# Altium PCB Compressor.PcbDoc (part 1 of 2)
Units mm, origin at the board's own origin, x right, y up, seen from the top; angles counter-clockwise.
Board outline 111 x 68.75 mm, 2 copper layers (Top Layer, Bottom Layer), stack 1.57 mm thick; 59 components, 13 nets, 218 pads, 0 vias.
Unrouted connection lines stored in the file: 54.
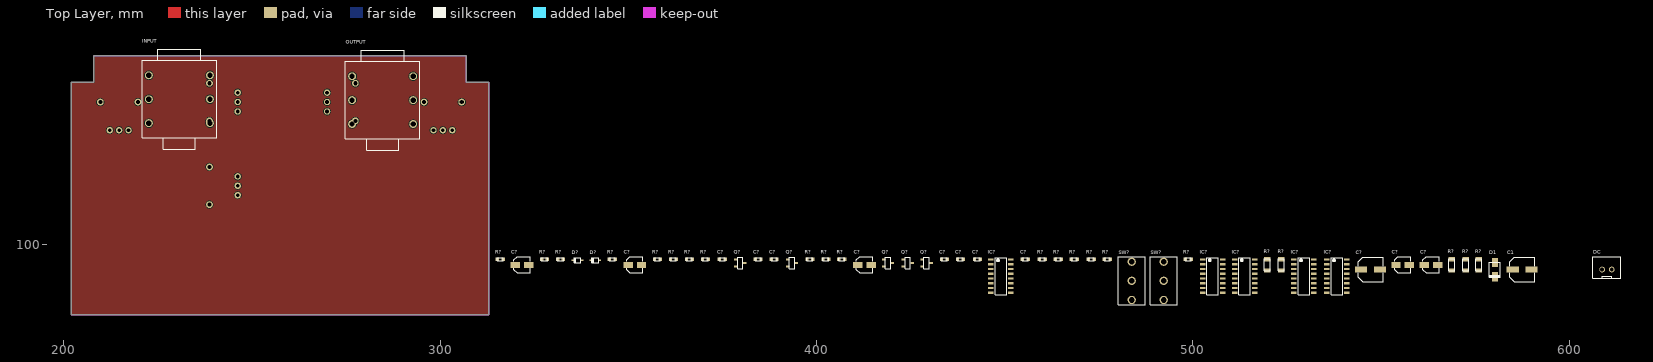
[diagram p0: Top Layer view]
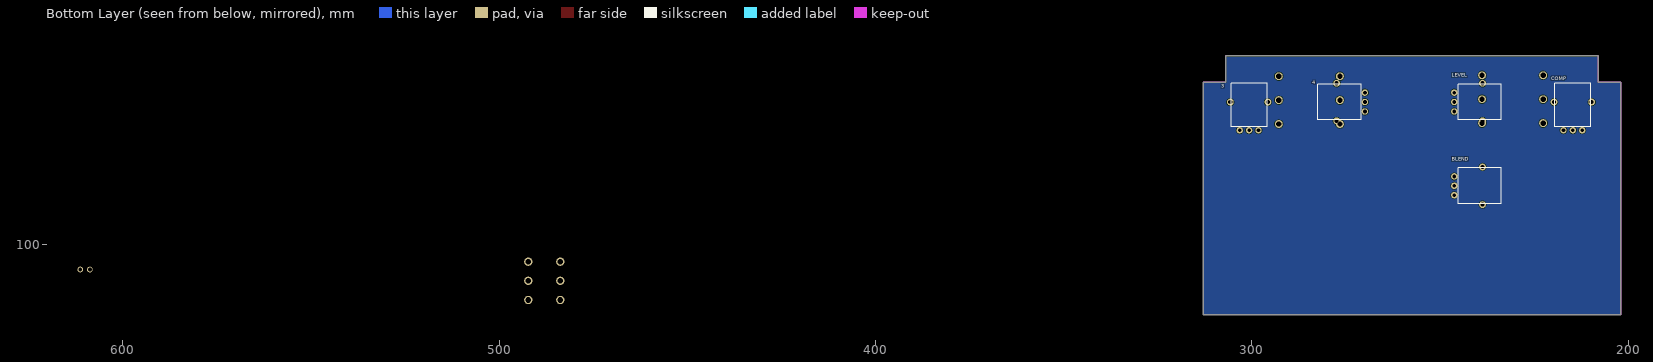
[diagram p1: Bottom Layer view, seen from below]

## Layer stack, top to bottom
Top Solder: solder mask 0.0127, Solder Resist, Dk 3.8
Top Layer: signal copper 0.035
Dielectric: core 1.5, FR-4, Dk 4.5
Bottom Layer: signal copper 0.035
Bottom Solder: solder mask 0.0127, Solder Resist, Dk 3.8

## Board outline
313,143 307,143 307,150 208,150 208,143 202,143 202,81.25 313,81.25

## Design rules (kind name [scope] priority, off if disabled: settings)
BoardOutlineClearance [All] p1: gap=0.2 ignorepadtopadclearanceinfootprint=FALSE except(0.3: Poly-OutlineEdge)
Clearance [All] p1: gap=0.152 ignorepadtopadclearanceinfootprint=FALSE except(0.102: Arc-Text Track-Text SMDPad-Text Fill-Text Poly-Text Region-Text Text-Text; 0.127: Arc-Via Track-Via SMDPad-Via Via-Via Via-Text; 0.25: Arc-Hole Track-Hole SMDPad-Hole THPad-Hole Via-Hole Fill-Hole Poly-Hole Region-Hole Text-Hole)
ComponentClearance [All] p1 off: gap=0.102 collisioncheckmode=3 verticalgap=0.102 showdistances=TRUE
DiffPairsRouting [All] p1: maxlimit=0.102 minlimit=0.102 mostfreqgap=0.102 toplayer_minwidth=0.102 toplayer_maxwidth=1816.048 toplayer_prefwidth=0.102 bottomlayer_minwidth=0.102 bottomlayer_maxwidth=1816.048 bottomlayer_prefwidth=0.102 maxuncoupledlength=12.7
Height [All] p1 off: minheight=0 maxheight=1816.048 prefheight=12.7
HoleSize [All] p1: absolutevalues=TRUE maxlimit=6.3 minlimit=0.2 maxpercent=80.000 minpercent=20.000
HoleToHoleClearance [All] p1: gap=0.25 allowstackedmicrovias=FALSE
MinimumAnnularRing [All] p1: minimumring=0.076
MinimumSolderMaskSliver [All] p1: minsoldermaskwidth=0
PlaneClearance [All] p1: clearance=0.152
PlaneConnect PlaneConnectPowerPads [InPadClass('PowerPads')] p1: planeconnectstyle=Direct reliefexpansion=0.508 reliefentries=4 reliefconductorwidth=0.254 reliefairgap=0.254
PlaneConnect [All] p2: pad.planeconnectstyle=Relief pad.reliefexpansion=0.3 pad.reliefentries=4 pad.reliefconductorwidth=0.203 pad.reliefairgap=0.203 via.planeconnectstyle=Direct via.reliefexpansion=0.3 via.reliefentries=4 via.reliefconductorwidth=0.127 via.reliefairgap=0.127
PolygonConnect PolygonConnectPowerPads [All vs (InPadClass('PowerPads'))] p1: connectstyle=Direct reliefconductorwidth=0.254 reliefentries=4 polygonreliefangle="90 Angle" airgapwidth=0.254
PolygonConnect [All] p2: thpad.connectstyle=Relief thpad.reliefconductorwidth=0.254 thpad.reliefentries=4 thpad.polygonreliefangle="90 Angle" thpad.airgapwidth=0.254 smdpad.connectstyle=Relief smdpad.reliefconductorwidth=0.203 smdpad.reliefentries=4 smdpad.polygonreliefangle="90 Angle" smdpad.airgapwidth=0.203 via.connectstyle=Direct via.reliefconductorwidth=0.127 via.reliefentries=4 via.polygonreliefangle="90 Angle" via.airgapwidth=0.127
RoutingVias [All] p1: holewidth=0.2 width=0.45 viastyle="Through Hole" minholewidth=0.2 minwidth=0.45 maxholewidth=6.3 maxwidth=6.55
SilkToSilkClearance [All] p1: silktosilkclearance=0
SilkToSolderMaskClearance [IsPad] p1: minsilkscreentomaskgap=0.102 clearancetoexposedcopper=TRUE
SolderMaskExpansion [All] p1: expansion=0.075 istentingtop=FALSE
Width [All] p1: maxlimit=1816.048 minlimit=0.102 preferedwidth=0.102
20 further rules are at their usual default settings.

## Classes and differential pairs
component class Compressor: 3 4 BLEND C1 C? COMP D1 D? DC IC? INPUT LEVEL OUTPUT Q? SW?

## Components (designator, comment, footprint, x,y, rotation, side; value= is the part's Value field where it differs from the comment)
3 "10kB" ALPHA_9MM_TOP 305.5,131.25 r180 bottom
4 "10kB" ALPHA_9MM_TOP 271,133 r90 bottom
BLEND "10kB" ALPHA_9MM_TOP 245.25,120.25 r270 bottom
C1 "100u" CAPAE_D 587.499,93.25 r0 top
C? "10u" CAPAE_B 563.249,94.5 r0 top
C? "180p" CHIP_0603 433.999,96 r0 top
C? "1u" CAPAE_B 321.749,94.5 r0 top
C? "100u" CAPAE_D 547.249,93.25 r0 top
C? "10n" CHIP_0603 388.749,96 r0 top
C? "10n" CHIP_0603 384.499,96 r0 top
C? "10u" CAPAE_B 351.749,94.5 r0 top
C? "330p" CHIP_0603 442.749,96 r0 top
C? "10u" CAPAE_B 555.749,94.5 r0 top
C? "10n" CHIP_0603 455.499,96 r0 top
C? "820p" CHIP_0603 438.249,96 r0 top
C? "1u" CAPAE_B 412.749,94.5 r0 top
C? "10n" CHIP_0603 374.999,96 r0 top
COMP "10kB" ALPHA_9MM_TOP 219.5,131.25 r180 bottom
D1 "S1A" DO214 580.249,93.25 r90 top
D? "1N4148WS" SOD323 336.499,95.75 r0 top
D? "1N4148WS" SOD323 341.249,95.75 r0 top
DC "J_JST-XH-02" JST-XH-02 609.999,93.25 r0 top
IC? "LM13700M" SO-16 448.999,91.5 r0 top
IC? "LM13700M" SO-16 529.499,91.5 r0 top
IC? "LM13700M" SO-16 505.249,91.5 r0 top
IC? "LM13700M" SO-16 513.749,91.5 r0 top
IC? "LM13700M" SO-16 538.249,91.5 r0 top
INPUT "J_STEREO" STEREO 230.75,138.5 r90 top (schematic designator J?)
LEVEL "10kB" ALPHA_9MM_TOP 245.25,142.5 r270 bottom
OUTPUT "J_STEREO" STEREO 284.75,138.25 r90 top (schematic designator J?)
Q? "MMBT5088" SOT23 429.249,95 r0 top
Q? "MMBT5088" SOT23 418.999,95 r0 top
Q? "MMBT5088" SOT23 393.499,95 r0 top
Q? "MMBT5088" SOT23 424.249,95 r0 top
Q? "MMBT5088" SOT23 379.749,95 r0 top
R? "1M" CHIP_R_0603 468.499,96 r0 top
R? "27k" CHIP_R_0603 315.999,96 r0 top
R? "10k" CHIP_R_0603 498.749,96 r0 top
R? "150k" CHIP_R_0603 464.249,96 r0 top
R? "47k" CHIP_R_1206 523.499,94.5 r90 top
R? "47k" CHIP_R_1206 575.999,94.5 r90 top
R? "4.7M" CHIP_R_0603 398.249,96 r0 top
R? "15k" CHIP_R_0603 370.499,96 r0 top
R? "47R" CHIP_R_1206 568.749,94.5 r90 top
R? "1M" CHIP_R_0603 361.999,96 r0 top
R? "150k" CHIP_R_0603 459.999,96 r0 top
R? "27k" CHIP_R_1206 519.749,94.5 r90 top
R? "10k" CHIP_R_0603 327.749,96 r0 top
R? "10k" CHIP_R_0603 357.749,96 r0 top
R? "39k" CHIP_R_0603 477.249,96 r0 top
R? "470k" CHIP_R_0603 366.249,96 r0 top
R? "56k" CHIP_R_1206 572.499,94.5 r90 top
R? "1k" CHIP_R_0603 406.749,96 r0 top
R? "1k" CHIP_R_0603 402.499,96 r0 top
R? "10k" CHIP_R_0603 472.999,96 r0 top
R? "1M" CHIP_R_0603 345.749,96 r0 top
R? "1M" CHIP_R_0603 331.999,96 r0 top
SW? "SPDT" SPDT 492.249,90.25 r90 top
SW? "SPDT" SPDT 483.749,90.25 r90 top

## Footprints (in the part's own frame and the unit in brackets; to place one, negate y for a bottom-side part, rotate by r counter-clockwise, add the part's x,y. Pads: shape width x height; smd on the part's side, far side on the other; paste and mask are expansions set on the pad)
ALPHA_9MM_TOP [mm]
  round 1.7 hole 1: 1(2.25,-1) 2(4.75,-1) 3(7.25,-1)
  round 1.8 hole 1.1: ""(-0.25,6.5) ""(9.75,6.5)
  silkscreen extent 0,0 9.5,11.5, body extent -1.02,-0.99 10.51,11.36, height 30.04
CAPAE_B [mm] "Aluminum Electrolytic Capacitor, Body 4.30x4.30x5.40mm, IPC Low Density"
  rect 2.5x1.6 smd: +(-1.772,0) -(1.772,0)
  silkscreen extent -2.15,-2.15 2.15,2.15, body extent -2.3,-2.14 2.3,2.16, height 5.41
CAPAE_D [mm] "Aluminum Electrolytic Capacitor, Body 6.60x6.60x5.40mm, IPC Low Density"
  rect 3.2x1.6 smd: +(-2.521,0) -(2.521,0)
  silkscreen extent -3.3,-3.3 3.3,3.3, body extent -3.53,-3.3 3.47,3.3, height 5.41
CHIP_0603 [mm] "Chip Capacitor, 2-Leads, Body 1.60x0.80mm, IPC Medium Density"
  rect 0.9x0.95 smd: 1(-0.775,0) 2(0.775,0)
  silkscreen extent -0.8,-0.4 0.8,0.4, body extent -0.75,-0.4 0.75,0.4, height 0.65
CHIP_R_0603 [mm] "Chip Resistor, 2-Leads, Body 1.60x0.80mm, IPC Medium Density"
  rect 0.9x0.95 smd: 1(-0.775,0) 2(0.775,0)
  silkscreen extent -0.8,-0.4 0.8,0.4, body extent -0.75,-0.4 0.75,0.4, height 0.63
CHIP_R_1206 [mm] "Chip Resistor 2-Leads, Body 3.20x1.60mm, IPC Medium Density"
  rect 1.1x1.75 smd: 1(-1.475,0) 2(1.475,0)
  silkscreen extent -1.6,-0.8 1.6,0.8, body extent -1.65,-0.8 1.65,0.8, height 0.76
DO214 [mm] "Molded Diode, 2-Leads, Body 4.30x2.63mm, IPC Medium Density"
  rect 2.5x1.65 smd: 1(-1.875,0) 2(1.875,0)
  silkscreen extent -2,-1.45 2,1.45, body extent -2.6,-1.3 2.6,1.3, height 2.4
JST-XH-02 [mil]
  round 60 hole 40: 1(-50,0) 2(50,0)
  silkscreen extent -146,-93 146,134, body extent -146,-95 146,131, height 276
SO-16 [mm] "SOIC, 16-Leads, Body 9.85x3.85mm, Pitch 1.27mm, IPC Medium Density"
  rect 1.45x0.6 smd: 1(-2.675,4.445) 2(-2.675,3.175) 3(-2.675,1.905) 4(-2.675,0.635) 5(-2.675,-0.635) 6(-2.675,-1.905) 7(-2.675,-3.175) 8(-2.675,-4.445) 9(2.675,-4.445) 10(2.675,-3.175) 11(2.675,-1.905) 12(2.675,-0.635) 13(2.675,0.635) 14(2.675,1.905) 15(2.675,3.175) 16(2.675,4.445)
  silkscreen extent -1.55,-4.95 1.55,4.95, body extent -3.07,-4.98 3.07,4.99, height 1.73
SOD323 [mm] "SODFL, 2-Leads, Body 1.25x2.50mm, IPC Medium Density"
  rect 0.8x0.4 smd: 1(-1.15,0) 2(1.15,0)
  silkscreen extent -0.9,-0.67 0.9,0.67, body extent -1.4,-0.68 1.3,0.67, height 0.79
SOT23 [mm] "SOT23, 3-Leads, Body 2.90x2.35mm, Pitch 0.95mm, IPC Medium Density"
  rect 0.95x0.6 smd: 1(-1.175,0.95) 2(-1.175,-0.95) 3(1.175,0)
  silkscreen extent -0.7,-1.5 0.7,1.5, body extent -1.25,-1.5 1.25,1.5, height 1.05
SPDT [mm]
  round 2.2 hole 1.5: 1(5.08,0) 2(0,0) 3(-5.08,0)
  silkscreen extent -6.35,-3.56 6.35,3.56, body extent -6.25,-3.68 6.25,3.33, height 28.27
STEREO [mm]
  round 2.1 hole 1.4: R(0,8.115) RN(0,-8.115) S(6.35,8.115) SN(6.35,-8.115) T(-6.35,8.115) TN(-6.35,-8.115)
  silkscreen extent -13.25,-9.91 13.3,9.91, body extent -14.28,-9.97 14.28,10.03, height 15.5

## Part data
3 4 BLEND COMP LEVEL: library part POT_10kB_ALPHA_9mm, "10k Lin potentiometer round shaft", Package="PCB Mounted", Dimensions=9mm, Price=1.3
C1 C?: library part MCVVT025M101EA6L, "CAP ALUM 100UF 25V SMD", Capacitance=100uF, Manufacturer=Multicomp, Max Operating Temperature=105°C, Min Operating Temperature=-55°C, Ripple Current (AC)=6.3mA, Supplier Part Number 1=2611370, Voltage Rating=25V, ComponentLink1Description=http://www.farnell.com/datasheets/2151198.pdf?src-supplier=Element14, ComponentLink1URL=http://www.farnell.com/datasheets/2151198.pdf?src-supplier=Element14, Diameter=6.3mm, Height=7.7mm, Life (Hours)=2000Hour, Manufacturer Part Number=MCVVT025M101EA6L, Packaging="Tape and Reel", Price=0.102, Pricing="1=0.157, 50=0.104, 100=0.0932, 250=0.0801, 500=0.0681 (EUR)", REACH SVHC="No SVHC", RoHS=No, Stock=1063, Supplier 1=Farnell, Voltage Rating (DC)=25V
C? C? C?: library part MCVVT025M100CA1L, "CAP ALUM 10UF 25V SMD", Capacitance=10uF, Manufacturer=Multicomp, Max Operating Temperature=105°C, Min Operating Temperature=-55°C, Ripple Current (AC)=4mA, Supplier Part Number 1=2611368, Voltage Rating=25V, ComponentLink1Description=http://www.farnell.com/datasheets/2151198.pdf?src-supplier=Element14, ComponentLink1URL=http://www.farnell.com/datasheets/2151198.pdf?src-supplier=Element14, Diameter=4mm, Height=5.4mm, Life (Hours)=2000Hour, Manufacturer Part Number=MCVVT025M100CA1L, Packaging="Cut Tape", Price=0.0592, Pricing="5=0.0897, 50=0.0592, 250=0.0457, 500=0.0388, 1000=0.0338 (EUR)", REACH SVHC="No SVHC", RoHS=No, Stock=2773, Supplier 1=Farnell, Voltage Rating (DC)=25V
C?: library part MC0603N181J500CT, "CAP CER 180PF 50V C0G/NP0 0603", Capacitance=180pF, Case Code (Imperial)=0603, Case Code (Metric)=1608, Dielectric=C0G, Manufacturer=Multicomp, Max Operating Temperature=125°C, Min Operating Temperature=-55°C, Supplier Part Number 1=1759069, Temperature Coefficient=30ppm/°C, Tolerance=5%, Voltage Rating=50V, Case/Package=0603, Category="Ceramic Capacitors", ComponentLink1Description=http://www.farnell.com/datasheets/1901289.pdf?src-supplier=Farnell, ComponentLink1URL=http://www.farnell.com/datasheets/1901289.pdf?src-supplier=Farnell, ComponentLink2Description=http://www.farnell.com/datasheets/1901289.pdf?src-supplier=Element14, ComponentLink2URL=http://www.farnell.com/datasheets/1901289.pdf?src-supplier=Element14, Manufacturer Part Number=MC0603N181J500CT, Number of Pins=2, Packaging="Tape and Reel", Pricing="10=0.05250, 100=0.03150, 500=0.02250, 1000=0.01580, 2000=0.01210 (EUR)", REACH SVHC=Unknown, RoHS=Yes, Stock=9384, Supplier 1=Farnell, Voltage Rating (DC)=50V, Width=0.8mm
C?: library part MCVVT050M1R0CA1L, "CAP ALUM 1UF 25V SMD", Capacitance=1uF, Manufacturer=Multicomp, Max Operating Temperature=105°C, Min Operating Temperature=-55°C, Ripple Current (AC)=4mA, Voltage Rating=50V, ComponentLink1Description=http://www.farnell.com/datasheets/2151198.pdf?src-supplier=Element14, ComponentLink1URL=http://www.farnell.com/datasheets/2151198.pdf?src-supplier=Element14, Diameter=4mm, Height=5.4mm, Life (Hours)=2000Hour, Manufacturer Part Number=MCVVT050M1R0CA1L, Packaging="Cut Tape", Price=0.0585, Pricing 1="5 = 0.08970, 50 = 0.05910, 250 = 0.04570, 500 = 0.03880, 1000 = 0.03380 (EUR)", REACH SVHC="No SVHC", RoHS=No, Stock 1=6525, Supplier 1=Farnell, Voltage Rating (DC)=50V
C? C? C? C?: library part GRM1885C1H103JA01D, "CAP CER 10NF 50V C0G/NP0 0603", Capacitance=10nF, Case Code (Imperial)=0603, Case Code (Metric)=1608, Dielectric=C0G, Manufacturer=Murata, Max Operating Temperature=125°C, Min Operating Temperature=-55°C, Package Quantity=4000, Supplier Part Number 1=2456107, Tolerance=5%, Voltage=50V, Case/Package=0603, ComponentLink1Description=https://datasheet.ciiva.com/29537/partnumbering-e-01-29537910.pdf?src-supplier=Digi-Key, ComponentLink1URL=https://datasheet.ciiva.com/29537/partnumbering-e-01-29537910.pdf?src-supplier=Digi-Key, ComponentLink2Description=https://datasheet.ciiva.com/41860/partnumbering-e-01-41860759.pdf?src-supplier=Digi-Key, ComponentLink2URL=https://datasheet.ciiva.com/41860/partnumbering-e-01-41860759.pdf?src-supplier=Digi-Key, Depth=0.8mm, Height=0.8mm, Lead Free="Lead Free", Lead Pitch=0.5mm, Length=1.6mm, Manufacturer Part Number=GRM1885C1H103JA01D, Material=Ceramic, Mount="Surface Mount", Packaging="Tape and Reel", Price=0.0723, Pricing 1="10 = 0.16600, 100 = 0.07230, 500 = 0.04810, 1000 = 0.04130, 2000 = 0.03640 (EUR)", REACH SVHC="No SVHC", RoHS=Yes, Stock 1=99456, Supplier 1=Farnell, Termination=SMD/SMT, Thickness=0.035inch, Voltage Rating=50V, Voltage Rating (DC)=50V, Width=0.8mm
C?: library part MC0603N331J500CT, "CAP CER 330PF 50V C0G/NP0 0603", Capacitance=330pF, Case Code (Imperial)=0603, Case Code (Metric)=1608, Dielectric=C0G, Manufacturer=Multicomp, Max Operating Temperature=125°C, Min Operating Temperature=-55°C, Supplier Part Number 1=1759076, Temperature Coefficient=30ppm/°C, Tolerance=5%, Voltage Rating=50V, Case/Package=0603, Category="Ceramic Capacitors", ComponentLink1Description=https://datasheet.ciiva.com/22675/ta-1098-22675385.pdf?src-supplier=Element14, ComponentLink1URL=https://datasheet.ciiva.com/22675/ta-1098-22675385.pdf?src-supplier=Element14, ComponentLink2Description=https://datasheet.ciiva.com/22675/1901289-22675319.pdf?src-supplier=Element14, ComponentLink2URL=https://datasheet.ciiva.com/22675/1901289-22675319.pdf?src-supplier=Element14, Manufacturer Part Number=MC0603N331J500CT, Number of Pins=2, Packaging="Cut Tape", Pricing="10=0.04000, 100=0.03000, 500=0.01710, 1000=0.01200, 2000=0.01110 (EUR)", REACH SVHC=Unknown, RoHS=Yes, Stock=24473, Supplier 1=Farnell, Voltage Rating (DC)=50V, Width=0.8mm
C?: library part MC0603N821J500CT, "CAP CER 820PF 50V C0G/NP0 0603", Capacitance=820pF, Case Code (Imperial)=0603, Case Code (Metric)=1608, Dielectric=C0G, Manufacturer=Multicomp, Max Operating Temperature=125°C, Min Operating Temperature=-55°C, Supplier Part Number 1=1759087, Temperature Coefficient=30ppm/°C, Tolerance=5%, Voltage Rating=50V, Case/Package=0603, Category="Ceramic Capacitors", ComponentLink1Description=https://datasheet.ciiva.com/22648/1901289-22648517.pdf?src-supplier=Element14, ComponentLink1URL=https://datasheet.ciiva.com/22648/1901289-22648517.pdf?src-supplier=Element14, ComponentLink2Description=https://datasheet.ciiva.com/22648/1901289-22648518.pdf?src-supplier=Element14, ComponentLink2URL=https://datasheet.ciiva.com/22648/1901289-22648518.pdf?src-supplier=Element14, ComponentLink3Description=https://datasheet.ciiva.com/22684/1901289-22684006.pdf?src-supplier=Element14, ComponentLink3URL=https://datasheet.ciiva.com/22684/1901289-22684006.pdf?src-supplier=Element14, Manufacturer Part Number=MC0603N821J500CT, Number of Pins=2, Packaging="Tape and Reel", Pricing="10=0.08560, 100=0.05140, 500=0.02570, 1000=0.02280, 2000=0.01980 (EUR)", REACH SVHC=Unknown, RoHS=Yes, Stock=9450, Supplier 1=Farnell, Voltage Rating (DC)=50V, Width=0.8mm
C?: library part EEEFC1H1R0R, "CAP ALUM 1UF 50V LESR SMD", Capacitance=1uF, Case/Package=Radial, Dielectric Material=Aluminium, ESR (Equivalent Series Resistance)=5R, Leakage Current=3uA, Manufacturer=Panasonic, Max Operating Temperature=105°C, Min Operating Temperature=-40°C, Package Quantity=2000, Ripple Current=30mA, Supplier Part Number 1=9694528, Tolerance=20%, Voltage=50V, ComponentLink1Description=https://datasheet.ciiva.com/11779/0900766b806bc525-11779769.pdf?src-supplier=RSComponents, ComponentLink1URL=https://datasheet.ciiva.com/11779/0900766b806bc525-11779769.pdf?src-supplier=RSComponents, ComponentLink2Description=https://datasheet.ciiva.com/29313/443524-da-01-en-smd-elko-vfc-b-1-0-uf-50v-29313787.pdf?src-supplier=Conrad, ComponentLink2URL=https://datasheet.ciiva.com/29313/443524-da-01-en-smd-elko-vfc-b-1-0-uf-50v-29313787.pdf?src-supplier=Conrad, ComponentLink3Description=https://datasheet.ciiva.com/10331/aba0000ce5-10331045.pdf?src-supplier=Avnet, ComponentLink3URL=https://datasheet.ciiva.com/10331/aba0000ce5-10331045.pdf?src-supplier=Avnet, ComponentLink4Description=https://datasheet.ciiva.com/43485/31718-43485413.pdf?src-supplier=Farnell, ComponentLink4URL=https://datasheet.ciiva.com/43485/31718-43485413.pdf?src-supplier=Farnell, ComponentLink5Description=https://datasheet.ciiva.com/17353/aba0000ce5-17353382.pdf?src-supplier=Avnet+Europe, ComponentLink5URL=https://datasheet.ciiva.com/17353/aba0000ce5-17353382.pdf?src-supplier=Avnet+Europe, ComponentLink6Description=https://datasheet.ciiva.com/24024/aba0000ce5-68492-24024840.pdf?src-supplier=Mouser, ComponentLink6URL=https://datasheet.ciiva.com/24024/aba0000ce5-68492-24024840.pdf?src-supplier=Mouser, ComponentLink7Description=https://datasheet.ciiva.com/48542/eeefc-series-eng-tds-48542747.pdf?src-supplier=Distrelec, ComponentLink7URL=https://datasheet.ciiva.com/48542/eeefc-series-eng-tds-48542747.pdf?src-supplier=Distrelec, ComponentLink8Description=https://datasheet.ciiva.com/30181/aba0000ce5-30181516.pdf?src-supplier=Onlinecomponents.com, ComponentLink8URL=https://datasheet.ciiva.com/30181/aba0000ce5-30181516.pdf?src-supplier=Onlinecomponents.com, ComponentLink9Description=https://datasheet.ciiva.com/14596/70068018-14596941.pdf?src-supplier=Allied+Electronics, ComponentLink9URL=https://datasheet.ciiva.com/14596/70068018-14596941.pdf?src-supplier=Allied+Electronics, ComponentLink10Description=https://datasheet.ciiva.com/46388/31718-46388238.pdf?src-supplier=Element14, ComponentLink10URL=https://datasheet.ciiva.com/46388/31718-46388238.pdf?src-supplier=Element14, ComponentLink11Description=https://datasheet.ciiva.com/14606/70256381-14606527.pdf?src-supplier=Allied+Electronics, ComponentLink11URL=https://datasheet.ciiva.com/14606/70256381-14606527.pdf?src-supplier=Allied+Electronics, Contact Plating=Tin, Diameter=4mm, Height=5.4mm, Height - Seated (Max)=0.213inch, Impedance=5R, Lead Free="Lead Free", Lead Length=1.8mm, Lead Pitch=1mm, Length=5.5mm, Life (Hours)=1000Hour, Manufacturer Part Number=EEEFC1H1R0R, Material=Aluminium, Mount="Surface Mount", Number of Pins=2, Packaging="Tape and Reel", Price=0.151, Pricing 1="5 = 0.29200, 50 = 0.15100, 250 = 0.12600, 500 = 0.09460, 1000 = 0.07990 (EUR)", Radiation Hardening=No, REACH SVHC="No SVHC", Ripple Current (AC)=30mA, RoHS=Yes, Stock 1=3801, Supplier 1=Farnell, Termination=SMD/SMT, Voltage Rating=50V, Voltage Rating (DC)=50V, Width=4.3mm
D1: "DIODE GEN PURP 50V 1A SMA", Average Rectified Current=1A, Capacitance=12pF, Case/Package=SMA, Forward Voltage=1.1V, Manufacturer="ON Semiconductor / Fairchild", Max Forward Surge Current (Ifsm)=30A, Max Operating Temperature=150°C, Max Repetitive Reverse Voltage (Vrrm)=50V, Max Surge Current=40A, Min Operating Temperature=-55°C, Package Quantity=1, Peak Reverse Current=1uA, Power Dissipation=1.4W, Supplier Part Number 1=9843868, ComponentLink1Description=https://datasheet.ciiva.com/910/s1a-910480.pdf?src-supplier=Avnet, ComponentLink1URL=https://datasheet.ciiva.com/910/s1a-910480.pdf?src-supplier=Avnet, ComponentLink2Description=https://datasheet.ciiva.com/23683/1730038-23683616.pdf?src-supplier=Newark, ComponentLink2URL=https://datasheet.ciiva.com/23683/1730038-23683616.pdf?src-supplier=Newark, ComponentLink3Description=https://datasheet.ciiva.com/4452/s1a-191336-4452662.pdf?src-supplier=Mouser, ComponentLink3URL=https://datasheet.ciiva.com/4452/s1a-191336-4452662.pdf?src-supplier=Mouser, ComponentLink4Description=https://datasheet.ciiva.com/25624/0900766b80f9b629-25624903.pdf?src-supplier=RSComponents, ComponentLink4URL=https://datasheet.ciiva.com/25624/0900766b80f9b629-25624903.pdf?src-supplier=RSComponents, ComponentLink5Description=https://datasheet.ciiva.com/916/s1a-916898.pdf?src-supplier=Digi-Key, ComponentLink5URL=https://datasheet.ciiva.com/916/s1a-916898.pdf?src-supplier=Digi-Key, ComponentLink6Description=https://datasheet.ciiva.com/916/s1a-916899.pdf?src-supplier=Digi-Key, ComponentLink6URL=https://datasheet.ciiva.com/916/s1a-916899.pdf?src-supplier=Digi-Key, ComponentLink7Description=https://datasheet.ciiva.com/916/s1a-916900.pdf?src-supplier=Digi-Key, ComponentLink7URL=https://datasheet.ciiva.com/916/s1a-916900.pdf?src-supplier=Digi-Key, ComponentLink8Description=https://datasheet.ciiva.com/16800/s1a-16800103.pdf?src-supplier=Future+Electronics, ComponentLink8URL=https://datasheet.ciiva.com/16800/s1a-16800103.pdf?src-supplier=Future+Electronics, ComponentLink9Description=https://datasheet.ciiva.com/28469/1766308-28469031.pdf?src-supplier=Element14, ComponentLink9URL=https://datasheet.ciiva.com/28469/1766308-28469031.pdf?src-supplier=Element14, ComponentLink10Description=https://datasheet.ciiva.com/26231/s1k-26231832.pdf?src-supplier=Avnet+Europe, ComponentLink10URL=https://datasheet.ciiva.com/26231/s1k-26231832.pdf?src-supplier=Avnet+Europe, ComponentLink11Description=https://datasheet.ciiva.com/16474/s1k-16474283.pdf?src-supplier=Avnet+Asia, ComponentLink11URL=https://datasheet.ciiva.com/16474/s1k-16474283.pdf?src-supplier=Avnet+Asia, Contact Plating=Tin, Current Rating=1A, Element Configuration=Single, Forward Current=1A, Lead Free="Lead Free", Manufacturer Part Number=S1A, Max Reverse Voltage (DC)=50V, Mount="Surface Mount", Number of Pins=2, Output Current=1A, Packaging="Tape and Reel", Peak Non-Repetitive Surge Current=30A, Polarity=Standard, Price=0.072, Pricing="5=0.184, 25=0.179, 100=0.0727, 250=0.0669, 500=0.0667, 1000=0.0364, 5000=0.0293 (EUR)", Radiation Hardening=No, REACH SVHC="No SVHC", Recovery Time=1800ns, Reverse Recovery Time=1.8us, Reverse Voltage=50V, RoHS=Yes, Stock=34555, Supplier 1=Farnell, Voltage Rating (DC)=50V, Weight=0.106g, Width=5.28mm
D? D?: "DIODE GEN PURP 75V 150MA SOD323F", Average Rectified Current=150mA, Forward Voltage=1V, Manufacturer="ON Semiconductor / Fairchild", Max Forward Surge Current (Ifsm)=2A, Max Operating Temperature=150°C, Max Repetitive Reverse Voltage (Vrrm)=75V, Min Operating Temperature=-55°C, Package Quantity=1, Peak Reverse Current=5uA, Power Dissipation=200mW, Supplier Part Number 1=2453269, ComponentLink1Description=https://datasheet.ciiva.com/25968/1n914bws-25968945.pdf?src-supplier=Avnet+Europe, ComponentLink1URL=https://datasheet.ciiva.com/25968/1n914bws-25968945.pdf?src-supplier=Avnet+Europe, ComponentLink2Description=https://datasheet.ciiva.com/30479/0900766b810e1cd3-30479206.pdf?src-supplier=RSComponents, ComponentLink2URL=https://datasheet.ciiva.com/30479/0900766b810e1cd3-30479206.pdf?src-supplier=RSComponents, ComponentLink3Description=https://datasheet.ciiva.com/15208/getdatasheetpartid-127819-15208358.pdf?src-supplier=Verical, ComponentLink3URL=https://datasheet.ciiva.com/15208/getdatasheetpartid-127819-15208358.pdf?src-supplier=Verical, ComponentLink4Description=https://datasheet.ciiva.com/8300/1n914bws-8300360.pdf?src-supplier=Avnet, ComponentLink4URL=https://datasheet.ciiva.com/8300/1n914bws-8300360.pdf?src-supplier=Avnet, ComponentLink5Description=https://datasheet.ciiva.com/910/1n4148ws-910380.pdf?src-supplier=Digi-Key, ComponentLink5URL=https://datasheet.ciiva.com/910/1n4148ws-910380.pdf?src-supplier=Digi-Key, ComponentLink6Description=https://datasheet.ciiva.com/910/1n4148ws-910381.pdf?src-supplier=Digi-Key, ComponentLink6URL=https://datasheet.ciiva.com/910/1n4148ws-910381.pdf?src-supplier=Digi-Key, ComponentLink7Description=https://datasheet.ciiva.com/910/1n4148ws-910382.pdf?src-supplier=Digi-Key, ComponentLink7URL=https://datasheet.ciiva.com/910/1n4148ws-910382.pdf?src-supplier=Digi-Key, Contact Plating=Tin, Element Configuration=Single, Forward Current=150mA, Height=1mm, Lead Free="Lead Free", Length=1.8mm, Manufacturer Part Number=1N4148WS, Max Reverse Voltage (DC)=75V, Mount="Surface Mount", Number of Pins=2, Packaging="Tape and Reel", Price=0.0521, Pricing="5=0.155, 25=0.151, 100=0.0529, 250=0.0498, 500=0.0477, 1000=0.0243, 5000=0.0193 (EUR)", Radiation Hardening=No, REACH SVHC="No SVHC", Recovery Time=4ns, Reverse Recovery Time=4ns, Reverse Voltage=75V, RoHS=Yes, Stock=379338, Supplier 1=Farnell, Weight=0.0276g, Width=1.35mm
DC: "2 Pins male XH header", Price=0.1
IC? IC? IC? IC? IC?: library part LM13700M/NOPB, "IC OPAMP TRANSCOND 2MHZ 16SOIC", Case/Package=SOIC, Dual Supply Voltage=9V, Input Bias Current=8uA, Input Offset Voltage (Vos)=4mV, Input Resistance=26kR, Manufacturer="TI National Semiconductor", Max Dual Supply Voltage=18V, Max Input Voltage=5V, Max Operating Temperature=70°C, Max Output Current=650uA, Max Supply Current=2.6mA, Max Supply Voltage=36V, Min Input Voltage=-5V, Min Operating Temperature=0°C, Min Supply Voltage=10V, Output Current=20mA, Package Quantity=48, Supplier Part Number 1=3118203, Category="Amplifiers - Op Amps, Buffer, Instrumentation", Common Mode Rejection Ratio=80dB, ComponentLink1Description=https://datasheet.ciiva.com/27055/1992224-27055814.pdf?src-supplier=Jameco, ComponentLink1URL=https://datasheet.ciiva.com/27055/1992224-27055814.pdf?src-supplier=Jameco, ComponentLink2Description=https://datasheet.ciiva.com/15128/getdatasheetpartid-55618-15128167.pdf?src-supplier=Verical, ComponentLink2URL=https://datasheet.ciiva.com/15128/getdatasheetpartid-55618-15128167.pdf?src-supplier=Verical, ComponentLink3Description=https://datasheet.ciiva.com/1488/1839252-1488541.pdf?src-supplier=Element14, ComponentLink3URL=https://datasheet.ciiva.com/1488/1839252-1488541.pdf?src-supplier=Element14, ComponentLink4Description=https://datasheet.ciiva.com/1582/87555-1582990.pdf?src-supplier=Newark, ComponentLink4URL=https://datasheet.ciiva.com/1582/87555-1582990.pdf?src-supplier=Newark, ComponentLink5Description=https://datasheet.ciiva.com/14094/iplm13700-data-e-14094251.pdf?src-supplier=Distrelec, ComponentLink5URL=https://datasheet.ciiva.com/14094/iplm13700-data-e-14094251.pdf?src-supplier=Distrelec, ComponentLink6Description=https://datasheet.ciiva.com/1804/lm13700-1804254.pdf?src-supplier=Digi-Key, ComponentLink6URL=https://datasheet.ciiva.com/1804/lm13700-1804254.pdf?src-supplier=Digi-Key, Contact Plating=Tin, Gain Bandwidth Product=2MHz, Height=1.45mm, Lead Free="Lead Free", Length=9.91mm, Manufacturer Part Number=LM13700M/NOPB, Min Dual Supply Voltage=5V, Mount="Surface Mount", Nominal Supply Current=2.6mA, Number of Amplifiers=2, Number of Channels=2, Number of Circuits=2, Number of Elements=2, Number of Pins=16, Output Current per Channel=650uA, Packaging=Rail/Tube, Pricing="1=1.01000, 25=0.88700, 50=0.78400, 100=0.68100, 250=0.63800, 500=0.60200, 1000=0.55300, 2500=0.50300 (EUR)", Radiation Hardening=No, REACH SVHC="No SVHC", RoHS=Yes, Slew Rate=50V/µs, Stock=890, Supplier 1=Farnell, Unity Gain Bandwidth Product=2MHz, Width=3.91mm
INPUT OUTPUT: "6.35mm stereo insulated socket jack PCB mounted", Price=0.5
Q? Q? Q? Q? Q?: library part MMBT5088LT1G, "TRANS NPN 30V 0.05A SOT23", Case/Package=SOT-23-3, Collector Base Voltage (VCBO)=35V, Collector Emitter Breakdown Voltage=30V, Collector Emitter Saturation Voltage=500mV, Current Rating=50mA, Emitter Base Voltage (VEBO)=4.5V, Frequency=50MHz, Manufacturer="ON Semiconductor", Max Operating Temperature=150°C, Max Power Dissipation=300mW, Min Operating Temperature=-55°C, Package Quantity=1, Supplier Part Number 1=2464059, Category="Integrated Circuits (ICs)", Collector Emitter Voltage (VCEO)=30V, ComponentLink1Description=https://datasheet.ciiva.com/976/mmbt5088lt1-d-976496.pdf?src-supplier=Digi-Key, ComponentLink1URL=https://datasheet.ciiva.com/976/mmbt5088lt1-d-976496.pdf?src-supplier=Digi-Key, ComponentLink2Description=https://datasheet.ciiva.com/15139/getdatasheetpartid-93411-15139193.pdf?src-supplier=Verical, ComponentLink2URL=https://datasheet.ciiva.com/15139/getdatasheetpartid-93411-15139193.pdf?src-supplier=Verical, ComponentLink3Description=https://datasheet.ciiva.com/30480/0900766b8127ca6c-30480439.pdf?src-supplier=RSComponents, ComponentLink3URL=https://datasheet.ciiva.com/30480/0900766b8127ca6c-30480439.pdf?src-supplier=RSComponents, ComponentLink4Description=https://datasheet.ciiva.com/11198/mmbt5088lt1-d-11198728.pdf?src-supplier=Avnet, ComponentLink4URL=https://datasheet.ciiva.com/11198/mmbt5088lt1-d-11198728.pdf?src-supplier=Avnet, ComponentLink5Description=https://datasheet.ciiva.com/7972/mmbt5088lt1-d-7972395.pdf?src-supplier=Element14, ComponentLink5URL=https://datasheet.ciiva.com/7972/mmbt5088lt1-d-7972395.pdf?src-supplier=Element14, ComponentLink6Description=https://datasheet.ciiva.com/11201/mmbt5088lt1-d-11201836.pdf?src-supplier=Avnet, ComponentLink6URL=https://datasheet.ciiva.com/11201/mmbt5088lt1-d-11201836.pdf?src-supplier=Avnet, ComponentLink7Description=https://datasheet.ciiva.com/976/mmbt5088lt1-d-976495.pdf?src-supplier=Digi-Key, ComponentLink7URL=https://datasheet.ciiva.com/976/mmbt5088lt1-d-976495.pdf?src-supplier=Digi-Key, ComponentLink8Description=https://datasheet.ciiva.com/16397/mmbt5088lt1-d-16397013.pdf?src-supplier=Future+Electronics, ComponentLink8URL=https://datasheet.ciiva.com/16397/mmbt5088lt1-d-16397013.pdf?src-supplier=Future+Electronics, ComponentLink9Description=https://datasheet.ciiva.com/26115/mmbt5088lt1-d-26115146.pdf?src-supplier=Avnet+Europe, ComponentLink9URL=https://datasheet.ciiva.com/26115/mmbt5088lt1-d-26115146.pdf?src-supplier=Avnet+Europe, ComponentLink10Description=https://datasheet.ciiva.com/976/mmbt5088lt1-d-976494.pdf?src-supplier=Digi-Key, ComponentLink10URL=https://datasheet.ciiva.com/976/mmbt5088lt1-d-976494.pdf?src-supplier=Digi-Key, Contact Plating=Tin,Matte, Element Configuration=Single, Gain Bandwidth Product=50MHz, Height=1.01mm, hFE Min=300, Lead Free="Lead Free", Length=3.04mm, Manufacturer Part Number=MMBT5088LT1G, Max Breakdown Voltage=30V, Max Collector Current=50mA, Max Frequency=50MHz, Number of Elements=1, Number of Pins=3, Packaging="Tape and Reel", Polarity=NPN, Power Dissipation=300mW, Pricing="5=0.16600, 50=0.15800, 100=0.05640, 500=0.03410, 1500=0.03400 (EUR)", Radiation Hardening=No, REACH SVHC="No SVHC", RoHS=Yes, Stock=1883, Supplier 1=Farnell, Transition Frequency=50MHz, Voltage Rating (DC)=30V, Weight=0.01lb, Width=1.4mm
R? R? R? R?: library part CRCW06031M00FKEA, "RES SMD 1M OHM 1% 1/10W 0603", Case Code (Imperial)=0603, Case Code (Metric)=1608, Manufacturer=Vishay, Max Operating Temperature=155°C, Max Power Dissipation=100mW, Min Operating Temperature=-55°C, Package Quantity=10, Resistance=1MR, Supplier Part Number 1=1469746, Temperature Coefficient=100ppm/°C, Tolerance=1%, Voltage Rating=75V, Case/Package=0603, ComponentLink1Description=https://datasheet.ciiva.com/11809/0900766b80d98afc-11809074.pdf?src-supplier=RSComponents, ComponentLink1URL=https://datasheet.ciiva.com/11809/0900766b80d98afc-11809074.pdf?src-supplier=RSComponents, ComponentLink2Description=https://datasheet.ciiva.com/26314/fld-crcw-e3-data-en-26314645.pdf?src-supplier=Distrelec, ComponentLink2URL=https://datasheet.ciiva.com/26314/fld-crcw-e3-data-en-26314645.pdf?src-supplier=Distrelec, ComponentLink3Description=https://datasheet.ciiva.com/2465/dcrcwe3-2465549.pdf?src-supplier=Digi-Key, ComponentLink3URL=https://datasheet.ciiva.com/2465/dcrcwe3-2465549.pdf?src-supplier=Digi-Key, ComponentLink4Description=https://datasheet.ciiva.com/16311/dcrcwe3-16311533.pdf?src-supplier=Future+Electronics, ComponentLink4URL=https://datasheet.ciiva.com/16311/dcrcwe3-16311533.pdf?src-supplier=Future+Electronics, ComponentLink5Description=https://datasheet.ciiva.com/2465/dcrcwe3-2465550.pdf?src-supplier=Digi-Key, ComponentLink5URL=https://datasheet.ciiva.com/2465/dcrcwe3-2465550.pdf?src-supplier=Digi-Key, ComponentLink6Description=https://datasheet.ciiva.com/7841/1720486-7841822.pdf?src-supplier=Element14, ComponentLink6URL=https://datasheet.ciiva.com/7841/1720486-7841822.pdf?src-supplier=Element14, ComponentLink7Description=https://datasheet.ciiva.com/2465/dcrcwe3-2465551.pdf?src-supplier=Digi-Key, ComponentLink7URL=https://datasheet.ciiva.com/2465/dcrcwe3-2465551.pdf?src-supplier=Digi-Key, ComponentLink8Description=https://datasheet.ciiva.com/7841/125364-7841823.pdf?src-supplier=Element14, ComponentLink8URL=https://datasheet.ciiva.com/7841/125364-7841823.pdf?src-supplier=Element14, Composition="Thick Film", Contact Plating=Tin, Depth=0.85mm, Features="Automotive AEC-Q200", Height=0.45mm, Lead Free="Lead Free", Length=1.55mm, Manufacturer Part Number=CRCW06031M00FKEA, Military Standard=Not, Mount="Surface Mount", Number of Pins=2, Number of Terminations=2, Packaging="Tape and Reel", Power Rating=100mW, Price=0.0131, Pricing="10=0.0169, 100=0.013, 500=0.0113, 1000=0.008 (EUR)", Radiation Hardening=No, REACH SVHC=Unknown, RoHS=Yes, Stock=118520, Supplier 1=Farnell, Termination=SMD/SMT, Voltage Rating (DC)=75V, Weight=7.1E-05oz, Width=0.85mm
R?: library part CRCW060327K0FKEA, "RES SMD 27K OHM 1% 1/10W 0603", Case Code (Imperial)=0603, Case Code (Metric)=1608, Manufacturer=Vishay, Max Operating Temperature=155°C, Max Power Dissipation=100mW, Min Operating Temperature=-55°C, Package Quantity=10, Resistance=27kR, Supplier Part Number 1=1652864, Temperature Coefficient=100ppm/°C, Tolerance=1%, Voltage Rating=75V, Case/Package=0603, ComponentLink1Description=https://datasheet.ciiva.com/11810/0900766b80d98afc-11810797.pdf?src-supplier=RSComponents, ComponentLink1URL=https://datasheet.ciiva.com/11810/0900766b80d98afc-11810797.pdf?src-supplier=RSComponents, ComponentLink2Description=https://datasheet.ciiva.com/7841/1697337-7841575.pdf?src-supplier=Element14, ComponentLink2URL=https://datasheet.ciiva.com/7841/1697337-7841575.pdf?src-supplier=Element14, ComponentLink3Description=https://datasheet.ciiva.com/15159/getdatasheetpartid-45808-15159562.pdf?src-supplier=Verical, ComponentLink3URL=https://datasheet.ciiva.com/15159/getdatasheetpartid-45808-15159562.pdf?src-supplier=Verical, ComponentLink4Description=https://datasheet.ciiva.com/26314/fld-crcw-e3-data-en-26314668.pdf?src-supplier=Distrelec, ComponentLink4URL=https://datasheet.ciiva.com/26314/fld-crcw-e3-data-en-26314668.pdf?src-supplier=Distrelec, ComponentLink5Description=https://datasheet.ciiva.com/2466/dcrcwe3-2466269.pdf?src-supplier=Digi-Key, ComponentLink5URL=https://datasheet.ciiva.com/2466/dcrcwe3-2466269.pdf?src-supplier=Digi-Key, ComponentLink6Description=https://datasheet.ciiva.com/2466/dcrcwe3-2466271.pdf?src-supplier=Digi-Key, ComponentLink6URL=https://datasheet.ciiva.com/2466/dcrcwe3-2466271.pdf?src-supplier=Digi-Key, ComponentLink7Description=https://datasheet.ciiva.com/16395/dcrcwe3-16395398.pdf?src-supplier=Future+Electronics, ComponentLink7URL=https://datasheet.ciiva.com/16395/dcrcwe3-16395398.pdf?src-supplier=Future+Electronics, ComponentLink8Description=https://datasheet.ciiva.com/16893/dcrcw-16893962.pdf?src-supplier=Avnet+Europe, ComponentLink8URL=https://datasheet.ciiva.com/16893/dcrcw-16893962.pdf?src-supplier=Avnet+Europe, ComponentLink9Description=https://datasheet.ciiva.com/2466/dcrcwe3-2466270.pdf?src-supplier=Digi-Key, ComponentLink9URL=https://datasheet.ciiva.com/2466/dcrcwe3-2466270.pdf?src-supplier=Digi-Key, ComponentLink10Description=https://datasheet.ciiva.com/22871/70201119-22871598.pdf?src-supplier=Allied+Electronics, ComponentLink10URL=https://datasheet.ciiva.com/22871/70201119-22871598.pdf?src-supplier=Allied+Electronics, Composition="Thick Film", Contact Plating=Tin, Depth=0.85mm, Features="Automotive AEC-Q200", Height=0.45mm, Lead Free="Lead Free", Length=1.55mm, Manufacturer Part Number=CRCW060327K0FKEA, Military Standard=Not, Mount="Surface Mount", Number of Pins=2, Number of Terminations=2, Packaging="Tape and Reel", Power Rating=100mW, Price=0.0129, Pricing="10=0.0169, 100=0.013, 500=0.0113, 1000=0.0068 (EUR)", Radiation Hardening=No, REACH SVHC=Unknown, RoHS=Yes, Stock=74674, Supplier 1=Farnell, Termination=SMD/SMT, Voltage Rating (DC)=75V, Weight=7.1E-05oz, Width=0.85mm
R? R? R? R?: library part CRCW060310K0FKEA, "RES SMD 10K OHM 1% 1/10W 0603", Case Code (Imperial)=0603, Case Code (Metric)=1608, Manufacturer=Vishay, Max Operating Temperature=155°C, Max Power Dissipation=100mW, Min Operating Temperature=-55°C, Package Quantity=10, Resistance=10kR, Supplier Part Number 1=1469748, Temperature Coefficient=100ppm/°C, Tolerance=1%, Voltage Rating=75V, Case/Package=0603, ComponentLink1Description=https://datasheet.ciiva.com/11809/0900766b80d98afc-11809037.pdf?src-supplier=RSComponents, ComponentLink1URL=https://datasheet.ciiva.com/11809/0900766b80d98afc-11809037.pdf?src-supplier=RSComponents, ComponentLink2Description=https://datasheet.ciiva.com/16886/dcrcw-16886037.pdf?src-supplier=Avnet+Europe, ComponentLink2URL=https://datasheet.ciiva.com/16886/dcrcw-16886037.pdf?src-supplier=Avnet+Europe, ComponentLink3Description=https://datasheet.ciiva.com/26821/getdatasheetpartid-86831-26821109.pdf?src-supplier=Verical, ComponentLink3URL=https://datasheet.ciiva.com/26821/getdatasheetpartid-86831-26821109.pdf?src-supplier=Verical, ComponentLink4Description=https://datasheet.ciiva.com/16754/70201119-16754710.pdf?src-supplier=Allied+Electronics, ComponentLink4URL=https://datasheet.ciiva.com/16754/70201119-16754710.pdf?src-supplier=Allied+Electronics, ComponentLink5Description=https://datasheet.ciiva.com/16719/70201119-16719704.pdf?src-supplier=Allied+Electronics, ComponentLink5URL=https://datasheet.ciiva.com/16719/70201119-16719704.pdf?src-supplier=Allied+Electronics, ComponentLink6Description=https://datasheet.ciiva.com/2465/dcrcwe3-2465513.pdf?src-supplier=Digi-Key, ComponentLink6URL=https://datasheet.ciiva.com/2465/dcrcwe3-2465513.pdf?src-supplier=Digi-Key, ComponentLink7Description=https://datasheet.ciiva.com/5543/dcrcwe3-109170-5543001.pdf?src-supplier=Mouser, ComponentLink7URL=https://datasheet.ciiva.com/5543/dcrcwe3-109170-5543001.pdf?src-supplier=Mouser, ComponentLink8Description=https://datasheet.ciiva.com/2465/dcrcwe3-2465514.pdf?src-supplier=Digi-Key, ComponentLink8URL=https://datasheet.ciiva.com/2465/dcrcwe3-2465514.pdf?src-supplier=Digi-Key, ComponentLink9Description=https://datasheet.ciiva.com/46385/1697337-46385498.pdf?src-supplier=Element14, ComponentLink9URL=https://datasheet.ciiva.com/46385/1697337-46385498.pdf?src-supplier=Element14, ComponentLink10Description=https://datasheet.ciiva.com/2465/dcrcwe3-2465515.pdf?src-supplier=Digi-Key, ComponentLink10URL=https://datasheet.ciiva.com/2465/dcrcwe3-2465515.pdf?src-supplier=Digi-Key, ComponentLink11Description=https://datasheet.ciiva.com/3256/dcrcwe3-3256939.pdf?src-supplier=Avnet, ComponentLink11URL=https://datasheet.ciiva.com/3256/dcrcwe3-3256939.pdf?src-supplier=Avnet, ComponentLink12Description=https://datasheet.ciiva.com/3256/dcrcwe3-3256940.pdf?src-supplier=Avnet, ComponentLink12URL=https://datasheet.ciiva.com/3256/dcrcwe3-3256940.pdf?src-supplier=Avnet, ComponentLink13Description=https://datasheet.ciiva.com/16209/dcrcwe3-16209164.pdf?src-supplier=Future+Electronics, ComponentLink13URL=https://datasheet.ciiva.com/16209/dcrcwe3-16209164.pdf?src-supplier=Future+Electronics, ComponentLink14Description=https://datasheet.ciiva.com/26314/fld-crcw-e3-data-en-26314749.pdf?src-supplier=Distrelec, ComponentLink14URL=https://datasheet.ciiva.com/26314/fld-crcw-e3-data-en-26314749.pdf?src-supplier=Distrelec, Composition="Thick Film", Contact Plating=Tin, Depth=0.85mm, Features="Automotive AEC-Q200", Height=0.45mm, Lead Free="Lead Free", Length=1.55mm, Manufacturer Part Number=CRCW060310K0FKEA, Military Standard=Not, Number of Pins=2, Number of Terminations=2, Packaging="Tape and Reel", Power Rating=100mW, Price=0.0131, Pricing="10=0.0169, 100=0.013, 500=0.0113, 1000=0.008 (EUR)", Radiation Hardening=No, REACH SVHC=Unknown, RoHS=Yes, Stock=1391124, Supplier 1=Farnell, Termination=SMD/SMT, Voltage Rating (DC)=75V, Weight=7.1E-05oz, Width=0.033inch
R? R?: library part CRCW0603150KFKEA, "RES SMD 150K OHM 1% 1/10W 0603", Case Code (Imperial)=0603, Case Code (Metric)=1608, Manufacturer=Vishay, Max Operating Temperature=155°C, Min Operating Temperature=-55°C, Package Quantity=5000, Power Rating=100mW, Resistance=150kR, Supplier Part Number 1=1469759, Temperature Coefficient=100ppm/°C, Tolerance=1%, Voltage Rating=75V, Case/Package=0603, ComponentLink1Description=https://datasheet.ciiva.com/11809/0900766b80d98afc-11809072.pdf?src-supplier=RSComponents, ComponentLink1URL=https://datasheet.ciiva.com/11809/0900766b80d98afc-11809072.pdf?src-supplier=RSComponents, ComponentLink2Description=https://datasheet.ciiva.com/5551/dcrcwe3-109170-5551862.pdf?src-supplier=Mouser, ComponentLink2URL=https://datasheet.ciiva.com/5551/dcrcwe3-109170-5551862.pdf?src-supplier=Mouser, ComponentLink3Description=https://datasheet.ciiva.com/3257/dcrcwe3-3257048.pdf?src-supplier=Avnet, ComponentLink3URL=https://datasheet.ciiva.com/3257/dcrcwe3-3257048.pdf?src-supplier=Avnet, ComponentLink4Description=https://datasheet.ciiva.com/7673/1697337-7673288.pdf?src-supplier=Element14, ComponentLink4URL=https://datasheet.ciiva.com/7673/1697337-7673288.pdf?src-supplier=Element14, ComponentLink5Description=https://datasheet.ciiva.com/3257/dcrcwe3-3257049.pdf?src-supplier=Avnet, ComponentLink5URL=https://datasheet.ciiva.com/3257/dcrcwe3-3257049.pdf?src-supplier=Avnet, ComponentLink6Description=https://datasheet.ciiva.com/16885/dcrcwe3-16885417.pdf?src-supplier=Avnet+Europe, ComponentLink6URL=https://datasheet.ciiva.com/16885/dcrcwe3-16885417.pdf?src-supplier=Avnet+Europe, ComponentLink7Description=https://datasheet.ciiva.com/15159/getdatasheetpartid-37540-15159436.pdf?src-supplier=Verical, ComponentLink7URL=https://datasheet.ciiva.com/15159/getdatasheetpartid-37540-15159436.pdf?src-supplier=Verical, ComponentLink8Description=https://datasheet.ciiva.com/16391/dcrcwe3-16391407.pdf?src-supplier=Future+Electronics, ComponentLink8URL=https://datasheet.ciiva.com/16391/dcrcwe3-16391407.pdf?src-supplier=Future+Electronics, ComponentLink9Description=https://datasheet.ciiva.com/16761/70201119-16761887.pdf?src-supplier=Allied+Electronics, ComponentLink9URL=https://datasheet.ciiva.com/16761/70201119-16761887.pdf?src-supplier=Allied+Electronics, Composition="Thick Film", Contact Plating=Tin, Depth=0.85mm, Height=0.45mm, Lead Free="Lead Free", Length=1.55mm, Manufacturer Part Number=CRCW0603150KFKEA, Military Standard=Not, Mount="Surface Mount", Packaging="Tape and Reel", Price=0.0093, Pricing="10=0.0112, 100=0.0092, 500=0.0084, 1000=0.0075 (EUR)", REACH SVHC=Unknown, RoHS=Yes, Stock=76499, Supplier 1=Farnell, Termination=SMD/SMT, Voltage Rating (DC)=75V, Weight=7.1E-05oz, Width=0.85mm
R? R?: library part CRCW120647K0FKEA, "RES SMD 47K OHM 1% 1/4W 1206", Case Code (Imperial)=1206, Case Code (Metric)=3216, Manufacturer=Vishay, Max Operating Temperature=155°C, Max Power Dissipation=250mW, Min Operating Temperature=-55°C, Package Quantity=10, Resistance=47kR, Supplier Part Number 1=1470016, Temperature Coefficient=100ppm/°C, Tolerance=1%, Voltage Rating=200V, Case/Package=1206, ComponentLink1Description=https://datasheet.ciiva.com/11809/0900766b80d98b5e-11809091.pdf?src-supplier=RSComponents, ComponentLink1URL=https://datasheet.ciiva.com/11809/0900766b80d98b5e-11809091.pdf?src-supplier=RSComponents, ComponentLink2Description=https://datasheet.ciiva.com/16894/dcrcwe3-16894709.pdf?src-supplier=Avnet+Europe, ComponentLink2URL=https://datasheet.ciiva.com/16894/dcrcwe3-16894709.pdf?src-supplier=Avnet+Europe, ComponentLink3Description=https://datasheet.ciiva.com/26316/fld-crcw-e3-data-en-26316470.pdf?src-supplier=Distrelec, ComponentLink3URL=https://datasheet.ciiva.com/26316/fld-crcw-e3-data-en-26316470.pdf?src-supplier=Distrelec, ComponentLink4Description=https://datasheet.ciiva.com/7777/1697337-7777591.pdf?src-supplier=Element14, ComponentLink4URL=https://datasheet.ciiva.com/7777/1697337-7777591.pdf?src-supplier=Element14, ComponentLink5Description=https://datasheet.ciiva.com/7777/125364-7777592.pdf?src-supplier=Element14, ComponentLink5URL=https://datasheet.ciiva.com/7777/125364-7777592.pdf?src-supplier=Element14, ComponentLink6Description=https://datasheet.ciiva.com/16380/dcrcwe3-16380760.pdf?src-supplier=Future+Electronics, ComponentLink6URL=https://datasheet.ciiva.com/16380/dcrcwe3-16380760.pdf?src-supplier=Future+Electronics, ComponentLink7Description=https://datasheet.ciiva.com/2468/dcrcwe3-2468922.pdf?src-supplier=Digi-Key, ComponentLink7URL=https://datasheet.ciiva.com/2468/dcrcwe3-2468922.pdf?src-supplier=Digi-Key, ComponentLink8Description=https://datasheet.ciiva.com/2468/dcrcwe3-2468923.pdf?src-supplier=Digi-Key, ComponentLink8URL=https://datasheet.ciiva.com/2468/dcrcwe3-2468923.pdf?src-supplier=Digi-Key, ComponentLink9Description=https://datasheet.ciiva.com/2468/dcrcwe3-2468924.pdf?src-supplier=Digi-Key, ComponentLink9URL=https://datasheet.ciiva.com/2468/dcrcwe3-2468924.pdf?src-supplier=Digi-Key, ComponentLink10Description=https://datasheet.ciiva.com/7777/1697337-7777484.pdf?src-supplier=Element14, ComponentLink10URL=https://datasheet.ciiva.com/7777/1697337-7777484.pdf?src-supplier=Element14, ComponentLink11Description=https://datasheet.ciiva.com/22868/70201119-22868605.pdf?src-supplier=Allied+Electronics, ComponentLink11URL=https://datasheet.ciiva.com/22868/70201119-22868605.pdf?src-supplier=Allied+Electronics, ComponentLink12Description=https://datasheet.ciiva.com/9006/dcrcwe3-9006431.pdf?src-supplier=Avnet, ComponentLink12URL=https://datasheet.ciiva.com/9006/dcrcwe3-9006431.pdf?src-supplier=Avnet, Composition="Thick Film", Contact Plating=Tin, Depth=1.6mm, Features="Automotive AEC-Q200", Height=0.55mm, Lead Free="Lead Free", Length=3.2mm, Manufacturer Part Number=CRCW120647K0FKEA, Military Standard=Not, Number of Terminations=2, Packaging="Tape and Reel", Power Rating=250mW, Price=0.028, Pricing="10=0.0415, 100=0.0276, 500=0.0231, 1000=0.0135, 2500=0.0116 (EUR)", Radiation Hardening=No, REACH SVHC=Unknown, RoHS=Yes, Stock=31528, Supplier 1=Farnell, Termination=SMD/SMT, Voltage Rating (DC)=200V, Weight=0.000353oz, Width=1.6mm